# Altium PCB PCB_I.PcbDoc
Units mm, origin at the board's own origin, x right, y up, seen from the top; angles counter-clockwise.
Board outline 60 x 43.75 mm, 2 copper layers (Top Layer, Bottom Layer); 76 components, 81 nets, 394 pads, 51 vias.
Unrouted connection lines stored in the file: 2.
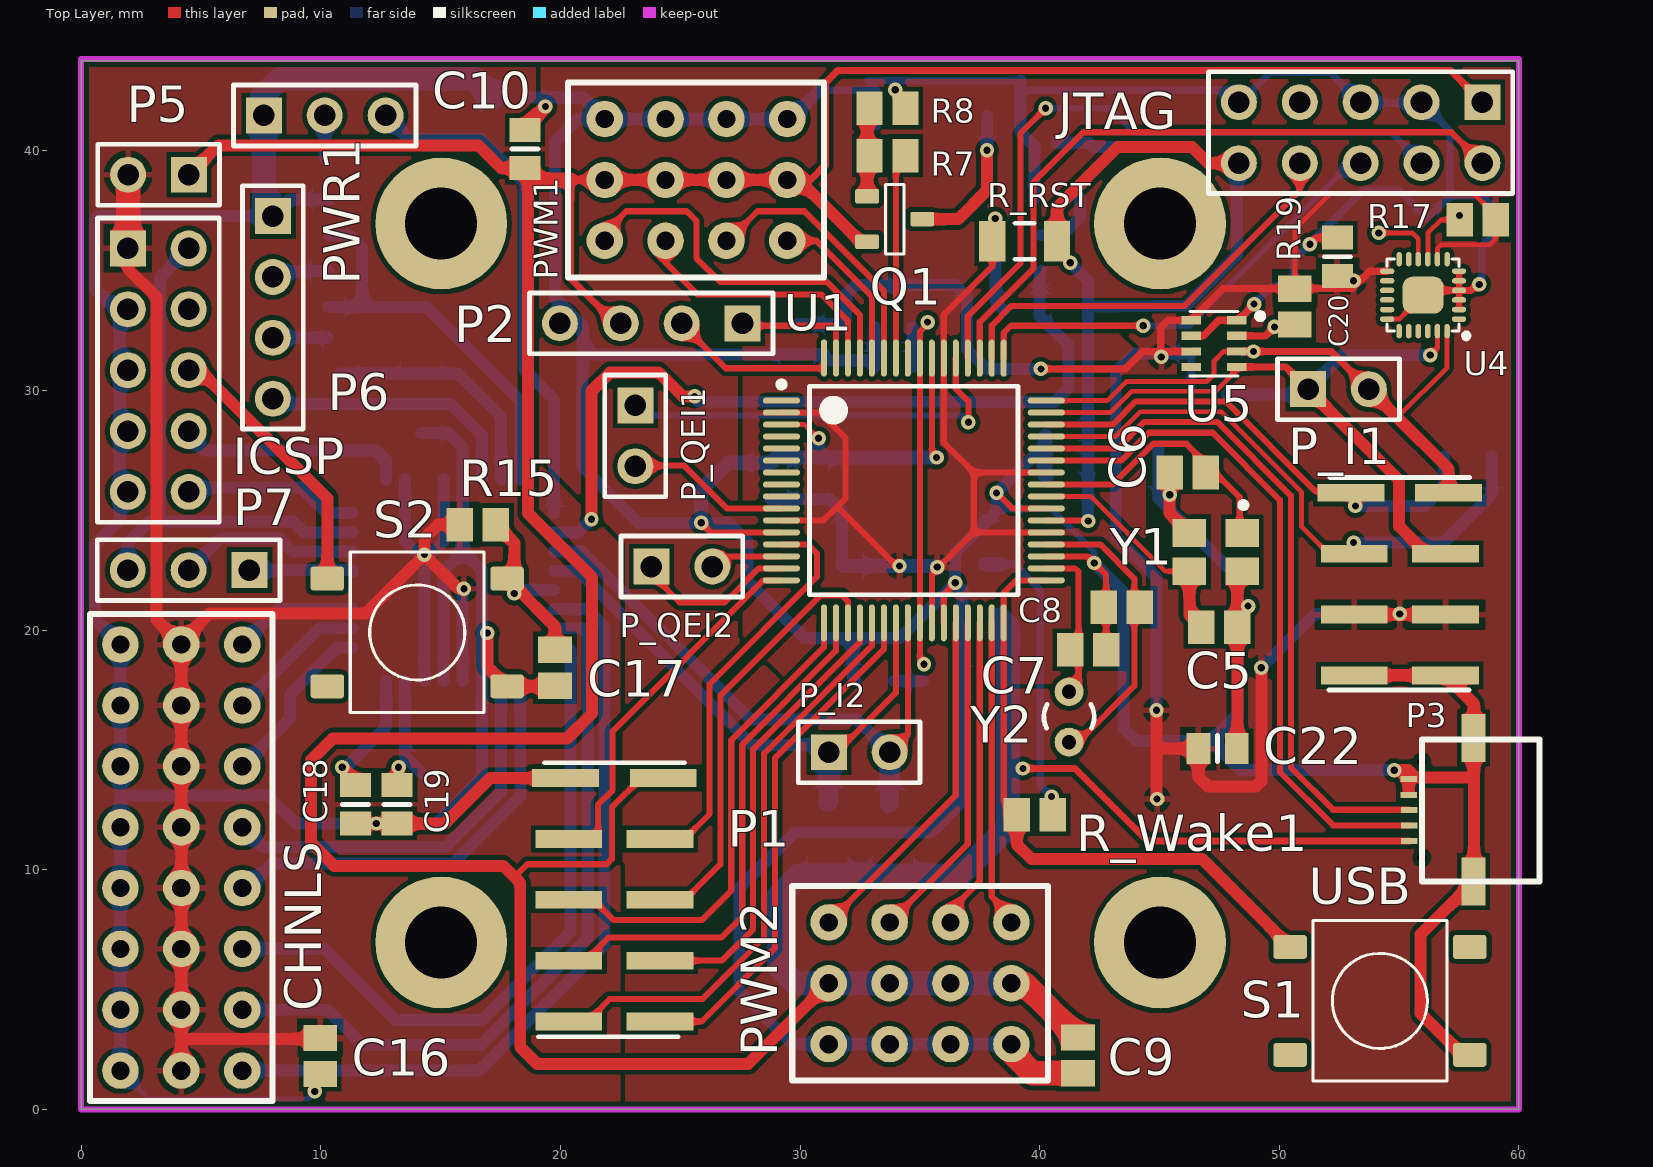
[diagram p0: Top Layer view]
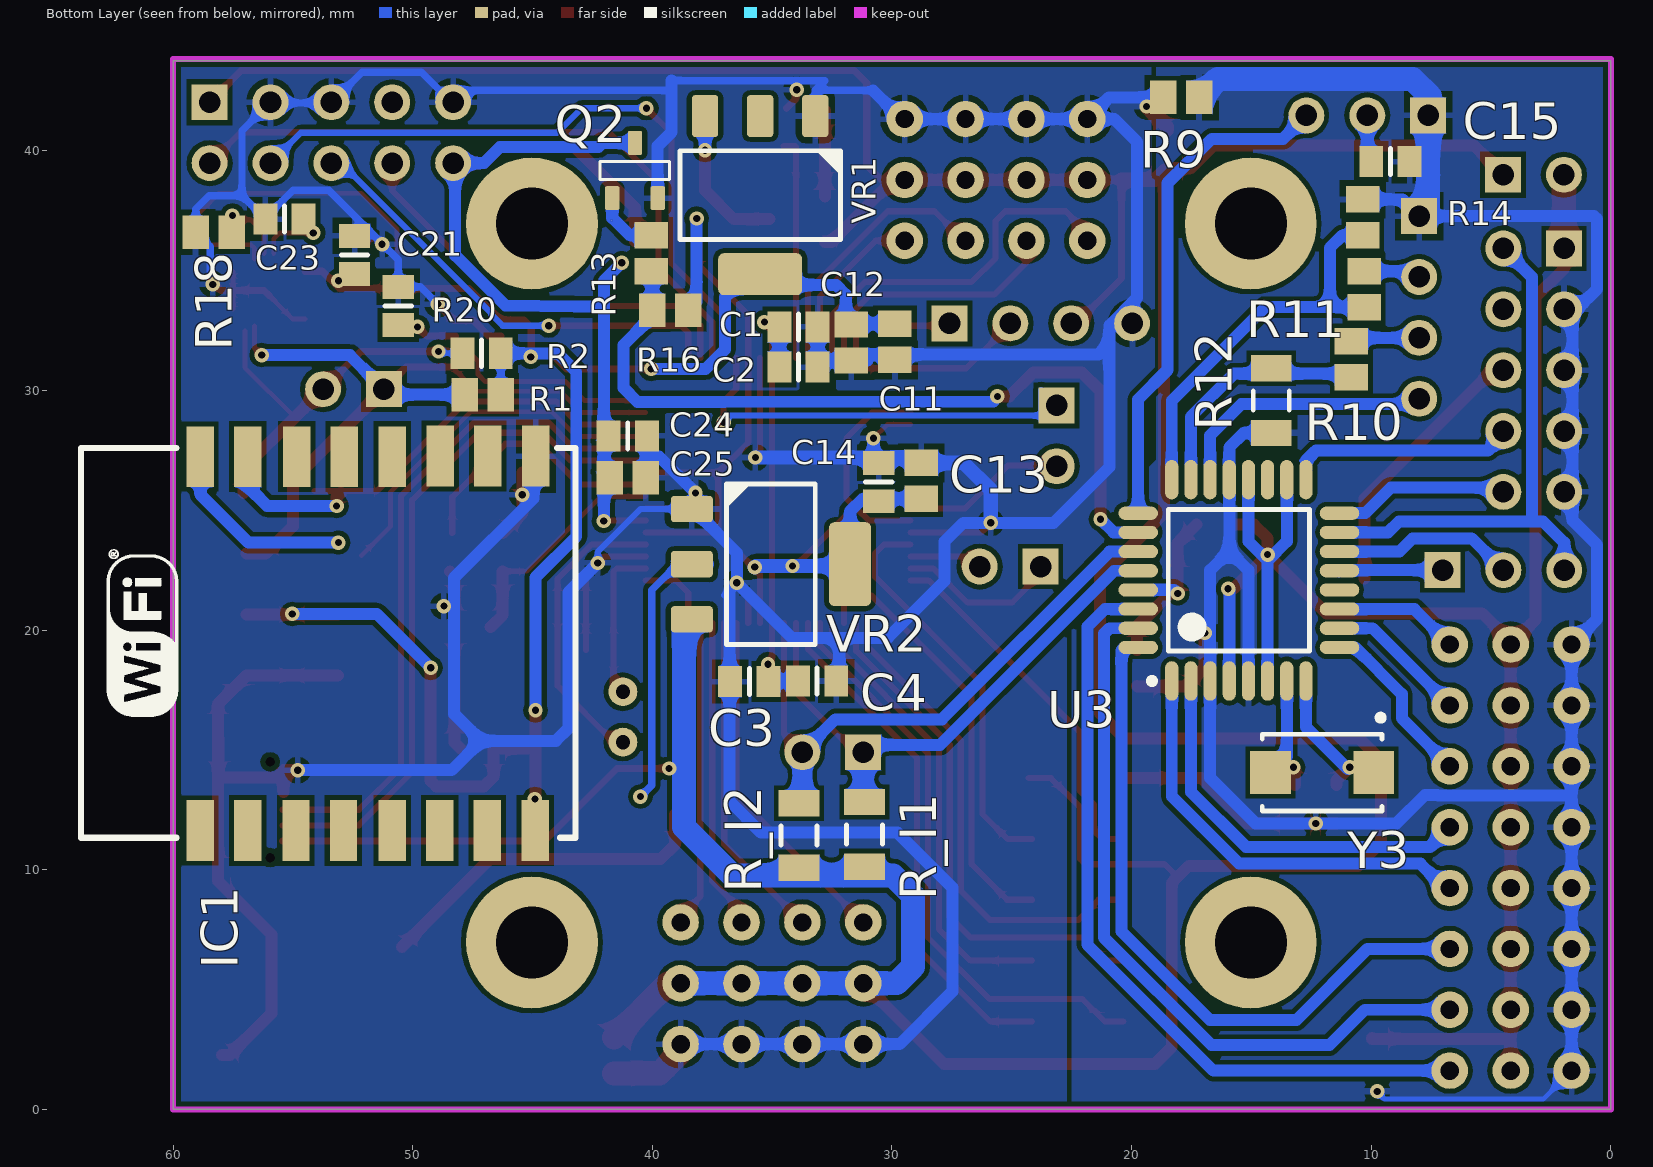
[diagram p1: Bottom Layer view, seen from below]

## Layer stack, top to bottom
Top Solder: solder mask 0.0102, Solder Resist, Dk 3.5
Top Layer: signal copper 0.0356
Dielectric 1: dielectric 0.32, FR-4, Dk 4.8
Bottom Layer: signal copper 0.0356
Bottom Solder: solder mask 0.0102, Solder Resist, Dk 3.5

## Board outline
0,0 60,0 60,43.75 0,43.75

## Design rules (kind name [scope] priority, off if disabled: settings)
Clearance [All] p1: gap=0.2
PolygonConnect [All] p1: connectstyle=Relief reliefconductorwidth=0.254 reliefentries=4 polygonreliefangle="90 Angle" airgapwidth=0.254
RoutingVias [All] p1: holewidth=0.711 width=1.27 viastyle="Through Hole" minholewidth=0.711 minwidth=1.27 maxholewidth=0.711 maxwidth=1.27
SilkToSilkClearance [All] p1: silktosilkclearance=0.1
SilkToSolderMaskClearance [IsPad] p1: minsilkscreentomaskgap=0.1 clearancetoexposedcopper=TRUE
SolderMaskExpansion [All] p1: expansion=0.125 useseparateexpansions=TRUE expansionbottom=0.125
Width [All] p1: maxlimit=1 minlimit=0.2 preferedwidth=0.5
28 further rules are at their usual default settings.

## Classes and differential pairs
component class Sensores: C20 C21 C22 C23 IC1 R17 R18 R19 R20 U4 U5
component class "Procesador Auxiliar": C17 C18 C19 C25 CHNLS ICSP P6 P7 Q2 R10 R11 R12 R13 R14 R15 R16 S2 U3 Y3
component class Alimentacion: C9 C10 C11 C12 C13 C14 C15 C16 P5 PWR1 Q1 R7 R8 R9 VR1 VR2
component class "Procesador Principal": C1 C2 C3 C4 C5 C6 C7 C8 C24 JTAG P1 P2 P3 P_I1 P_I2 P_QEI1 P_QEI2 PWM1 PWM2 R1 R2 R_I1 R_I2 R_RST R_Wake1 S1 U1 USB Y1 Y2

## Components (designator, comment, footprint, x,y, rotation, side; value= is the part's Value field where it differs from the comment)
C1 "Cap" 6-0805_L 33.9,32.65 r0 bottom
C2 "Cap" 6-0805_L 33.9,30.975 r0 bottom
C3 "Cap" 6-0805_L 35.95,17.85 r180 bottom
C4 "Cap" 6-0805_L 33.125,17.875 r0 bottom
C5 "Cap" C0805#1 47.5,20.125 r180 top
C6 "Cap" C0805#1 46.175,26.575 r180 top
C7 "Cap" C0805#1 42.025,19.175 r180 top
C8 "Cap" C0805#1 43.425,20.95 r180 top
C9 "Cap" C0805#1 41.6,2.25 r270 top
C10 "Cap Pol1" 6-0805_L 18.525,40.075 r90 top
C11 "Cap Pol1" C0805#1 29.875,32.025 r270 bottom
C12 "Cap Pol1" C0805#1 31.7,32 r270 bottom
C13 "Cap Pol1" C0805#1 28.775,26.225 r90 bottom
C14 "Cap" 6-0805_L 30.55,26.175 r90 bottom
C15 "Cap" 6-0805_L 9.2,39.55 r0 bottom
C16 "Cap" C0805#1 9.975,2.225 r90 top
C17 "Cap" C0805#1 19.775,18.425 r90 top
C18 "Cap Pol1" 6-0805_L 11.45,12.725 r90 top
C19 "Cap Pol1" 6-0805_L 13.175,12.725 r90 top
C20 "Cap" 6-0805_L 52.425,35.575 r90 top
C21 "Cap" 6-0805_L 52.425,35.65 r270 bottom
C22 "Cap" 6-0805_L 47.425,15.05 r180 top
C23 "Cap" 6-0805_L 55.35,37.15 r180 bottom
C24 "Cap" 6-0805_L 41.029,28.1 r0 bottom
C25 "Cap" C0805#1 41.029,26.36 r0 bottom
CHNLS "Header 8x3" "Header 8x3_mirror" -0.9,-0.925 r0 top
IC1 "ESP8266 ESP-07" "ESP8266 ESP-ANTENNA" 42.45,28.225 r90 bottom
ICSP "Header 5X2H" HDR2X5 1.95,35.925 r270 top
JTAG "Header 5X2" HDR2X5 58.475,42.025 r180 top (schematic designator JTAG1)
P1 "Header 5X2" "SMD_HEADER 5x2" 20.35,13.825 r270 top
P2 "Header 4" HDR1X4 27.6,32.8 r180 top
P3 "Header 4X2" "SMD_HEADER 4x2" 53.125,25.725 r270 top
P5 "Header 2" HDR1X2 4.5,39 r180 top
P6 "Header 4" HDR1X4 8,37.275 r270 top
P7 "Header 3" HDR1X3 7.025,22.5 r180 top
P_I1 "Header 2" HDR1X2 51.2,30.05 r0 top
P_I2 "Header 2" HDR1X2 31.2,14.9 r0 top
P_QEI1 "Header 2" HDR1X2 23.125,29.375 r270 top
P_QEI2 "Header 2" HDR1X2 23.8,22.65 r0 top
PWM1 "Header 4 x 3" Header_4x3_mirror 20.325,42.975 r270 top
PWM2 "Header 4 x 3" Header_4x3 29.675,9.325 r270 top
PWR1 "Header 3" HDR1X3 7.625,41.475 r0 top
Q1 "S8055" SOT23-3 33.95,37.15 r0 top
Q2 "S8050" SOT23-3 40.725,39.175 r90 bottom
R1 "Res1" C0805#1 47.075,29.825 r0 bottom
R2 "Res1" 6-0805_L 47.125,31.55 r180 bottom
R7 "Res1" C0805#1 33.65,39.8 r180 top
R8 "Res1" C0805#1 33.65,41.775 r180 top
R9 "Res1" C0805#1 17.925,42.225 r0 bottom
R10 "Res1" C0805#1 10.825,31.3 r90 bottom
R11 "Res1" C0805#1 10.3,34.225 r90 bottom
R12 "Res1" C1206 14.175,29.575 r90 bottom
R13 "Res1" C0805#1 40.05,35.725 r270 bottom
R14 "Res1" C0805#1 10.35,37.225 r270 bottom
R15 "Res1" C0805#1 16.55,24.4 r0 top
R16 "Res1" C0805#2 39.25,33.35 r180 top
R17 "Res1" C0805#1 58.275,37.125 r0 top
R18 "Res1" C0805#1 58.3,36.6 r0 bottom
R19 "Res1" C0805#1 50.65,33.5 r90 top
R20 "Res1" 6-0805_L 50.6,33.525 r90 bottom
R_I1 "Res1" C1206 31.15,11.475 r270 bottom
R_I2 "Res1" C1206 33.875,11.425 r270 bottom
R_RST "Res1" C1206 39.375,36.225 r0 top (schematic designator R_RST1)
R_Wake1 "Res1" C0805#1 39.8,12.3 r180 top
S1 "TS-1170S-WP" TS-1170S 54.2,4.525 r180 top
S2 "TS-1170S-WP" TS-1170S 14.025,19.9 r0 top
U1 "TM4C123GH6PM" SQFP50P1200X1200-64L 34.75,25.825 r0 top
U3 "ATmega8A-AU" 32A_N 15.525,22.075 r90 bottom
U4 "GYRO/ACCEL/COMPASS/9-AXIS" QFN-24/3MM 56,33.975 r180 top
U5 "BMP280" LGA-8_BMP280(Primary) 47.275,31.95 r0 top
USB "1-353576-1" "Micro USB" 55.95,10.5 r90 top (schematic designator J1)
VR1 "Regulador 3.3V SMD" SOT223 35.5,38.15 r270 bottom
VR2 "Regulador 3.3V SMD" SOT223 35.05,22.75 r180 bottom
Y1 "XTAL" CFPX-5 47.35,23.25 r180 top
Y2 "XTAL" BCY-W2/D2.1 41.225,16.375 r180 top
Y3 "XTAL" 4SMX 12.05,14.05 r0 bottom

## Footprints (in the part's own frame and the unit in brackets; to place one, negate y for a bottom-side part, rotate by r counter-clockwise, add the part's x,y. Pads: shape width x height; smd on the part's side, far side on the other; paste and mask are expansions set on the pad)
4SMX [mm] "Quartz Crystal, SM; Body 5.2 x 3.4 mm (LxW max)"
  rect 1.7x1.8 smd: 1(-2.15,0) 2(2.15,0)
  silkscreen extent -2.57,-2.42 2.5,1.6
6-0805_L [mm] "Chip Resistor, Body 2.0x1.2mm, IPC High Density"
  rect 1x1.3 smd: 1(-0.8,0) 2(0.8,0)
  silkscreen extent 0,-0.55 0,0.55, body extent -1.07,-0.7 1.07,0.7, height 0.7
32A_N [mm] "32-Pin Thin Quad Flat Pack 0.8 mm Pitch, IPC Medium Density"
  oval 1.65x0.55 smd: 1(-4.2,2.8) 2(-4.2,2) 3(-4.2,1.2) 4(-4.2,0.4) 5(-4.2,-0.4) 6(-4.2,-1.2) 7(-4.2,-2) 8(-4.2,-2.8) 17(4.2,-2.8) 18(4.2,-2) 19(4.2,-1.2) 20(4.2,-0.4) 21(4.2,0.4) 22(4.2,1.2) 23(4.2,2) 24(4.2,2.8)
  oval 0.55x1.65 smd: 9(-2.8,-4.2) 10(-2,-4.2) 11(-1.2,-4.2) 12(-0.4,-4.2) 13(0.4,-4.2) 14(1.2,-4.2) 15(2,-4.2) 16(2.8,-4.2) 25(2.8,4.2) 26(2,4.2) 27(1.2,4.2) 28(0.4,4.2) 29(-0.4,4.2) 30(-1.2,4.2) 31(-2,4.2) 32(-2.8,4.2)
  silkscreen extent -4.32,-2.95 2.95,3.75, body extent -3.5,-3.5 3.5,3.5, height 1.2
BCY-W2/D2.1 [mm] "Crystal, Thru-Hole; 2 Leads; Body 2.1 x 6.2 mm (Dia.xH)"
  round 1.2 hole 0.6: 1(0,1.05) 2(0,-1.05)
  silkscreen extent -1.05,-0.53 1.05,0.48
C0805#1 [mm] "Chip Capacitor, Body 2.0x1.3mm, IPC High Density"
  rect 1.1x1.4 smd: 1(-0.75,0) 2(0.75,0)
  body extent -1.1,-0.72 1.1,0.72, height 1.4
C0805#2 [mm] "Chip Capacitor, Body 2.0x1.3mm, IPC High Density"
  rect 1.1x1.4 smd far side: 1(0.75,0) 2(-0.75,0)
  body extent -1.1,-0.72 1.1,0.72, height 1.4
C1206 [mm] "Chip Capacitor, Body 3.2x1.6mm, IPC High Density"
  rect 1.1x1.7 smd: 1(-1.35,0) 2(1.35,0)
  silkscreen extent -0.4,-0.75 0.4,0.75, body extent -1.7,-0.9 1.7,0.9, height 1.3
CFPX-5 [mm] "Quartz Crystal, SM; Body 3.4 x 2.7 mm (LxW max)"
  rect 1.4x1.15 smd: 1(-1.1,-0.8) 2(1.1,-0.8) 3(1.1,0.8) 4(-1.1,0.8)
  silkscreen extent -1.27,-2.09 -1.03,-1.84
"ESP8266 ESP-ANTENNA" [mil] "ESP8266 ESP-ANTENNA"
  rect 100x45 smd: 1(-653,646) 2(-653,568) 3(-653,489) 4(-653,411) 5(-653,331) 6(-653,253) 7(-653,175) 8(-653,96) 9(-38,95) 10(-38,174) 11(-38,252) 12(-39,331) 13(-39,410) 14(-39,488) 15(-39,568) 16(-39,646)
  silkscreen extent -665,30 -25,842
HDR1X2 [mm] "Connector; Header; 2 Position"
  rect 1.5x1.5 hole 0.9: 1(0,0)
  round 1.5 hole 0.9: 2(2.54,0)
  silkscreen extent -1.27,-1.27 3.81,1.27
HDR1X3 [mm] "Connector; Header; 3 Position"
  rect 1.5x1.5 hole 0.9: 1(0,0)
  round 1.5 hole 0.9: 2(2.54,0) 3(5.08,0)
  silkscreen extent -1.27,-1.27 6.35,1.27
HDR1X4 [mm] "Connector; Header; 4 Position"
  rect 1.5x1.5 hole 0.9: 1(0,0)
  round 1.5 hole 0.9: 2(2.54,0) 3(5.08,0) 4(7.62,0)
  silkscreen extent -1.27,-1.27 8.89,1.27
HDR2X5 [mm] "Connector; Header; 5x2 Position"
  rect 1.5x1.5 hole 0.9: 1(0,0)
  round 1.5 hole 0.9: 2(0,2.54) 3(2.54,0) 4(2.54,2.54) 5(5.08,0) 6(5.08,2.54) 7(7.62,0) 8(7.62,2.54) 9(10.16,0) 10(10.16,2.54)
  silkscreen extent -1.27,-1.27 11.43,3.81
"Header 8x3_mirror" [mil]
  round 60 hole 30: 1(300,100) 2(300,200) 3(300,300) 4(300,400) 5(300,500) 6(300,600) 7(300,700) 8(300,800) GND(100,100) GND(100,200) GND(100,300) GND(100,400) GND(100,500) GND(100,600) GND(100,700) GND(100,800) VCC(200,100) VCC(200,200) VCC(200,300) VCC(200,400) VCC(200,500) VCC(200,600) VCC(200,700) VCC(200,800)
  silkscreen extent 50,50 350,850
Header_4x3 [mil]
  round 60 hole 30: 1(60,60) 2(60,160) 3(60,260) 4(60,360) 5(160,260) 5(160,360) 5(160,160) 5(160,60) 6(260,160) 6(260,260) 6(260,360) 6(260,60)
  silkscreen extent 0,0 320,420
Header_4x3_mirror [mil]
  round 60 hole 30: 1(265,60) 2(265,160) 3(265,260) 4(265,360) 5(165,260) 5(165,360) 5(165,160) 5(165,60) 6(65,360) 6(65,260) 6(65,160) 6(65,60)
  silkscreen extent 5,0 325,420
LGA-8_BMP280(Primary) [mm]
  rect 0.8x0.35 smd paste-25.4 mask-25.4: 1(0.95,0.975) 2(0.95,0.325) 3(0.95,-0.325) 4(0.95,-0.975) 5(-0.95,-0.975) 6(-0.95,-0.325) 7(-0.95,0.325) 8(-0.95,0.975)
  silkscreen extent -1,-1.35 2.02,1.35
"Micro USB" [mm]
  round 0 hole 0.4: 0(0,0) 0(4,0)
  rect 0.25x0.7 smd: 1(0.7,0.525) 2(1.35,0.525) 3(2,0.525) 4(2.625,0.55) 5(3.275,0.55)
  rect 2x1 smd: 6(-1,-2.15) 6(5,-2.15)
  silkscreen extent -1,-4.9 4.92,0
QFN-24/3MM [mm]
  rrect50% 1.7x1.54 smd: 0(0,0)
  rrect100% 0.6x0.23 smd: 1(-1.5,1) 2(-1.5,0.6) 3(-1.5,0.2) 4(-1.5,-0.2) 5(-1.5,-0.6) 6(-1.5,-1) 13(1.5,-1) 14(1.5,-0.6) 15(1.5,-0.2) 16(1.5,0.2) 17(1.5,0.6) 18(1.5,1)
  rrect100% 0.23x0.6 smd: 7(-1,-1.5) 8(-0.6,-1.5) 9(-0.2,-1.5) 10(0.2,-1.5) 11(0.6,-1.5) 12(1,-1.5) 19(1,1.5) 20(0.6,1.5) 21(0.2,1.5) 22(-0.2,1.5) 23(-0.6,1.5) 24(-1,1.5)
  silkscreen extent -2,-1.5 1.5,1.9
"SMD_HEADER 4x2" [mm]
  rect 0.74x2.79 smd: 1(0,-0.13) 2(0,3.94) 3(2.54,3.81) 4(2.54,0) 5(5.08,0) 6(5.08,3.81) 7(7.62,0) 8(7.62,3.81)
  silkscreen extent -0.64,-1.05 8.23,4.83
"SMD_HEADER 5x2" [mm]
  rect 0.74x2.79 smd: 1(0,-0.13) 2(0,3.94) 3(2.54,3.81) 4(2.54,0) 5(5.08,0) 6(5.08,3.81) 7(7.62,0) 8(7.62,3.81) 9(10.16,0) 10(10.16,3.81)
  silkscreen extent -0.64,-1.27 10.79,4.83
SOT23-3 [mm] "SOT23, 3 pin"
  round 0.5 on Mech15: 0(0,0)
  rrect25% 1x0.6 smd: 1(-1.15,0.95) 2(-1.15,-0.95) 3(1.15,0)
  silkscreen extent -0.38,-1.45 0.38,1.45, body extent -1.4,-1.45 1.4,1.45, height 1.29
SOT223 [mm] "SOT223 /SC-73"
  round 1 on Mech15: 0(0,0)
  rrect25% 1.75x1.1 smd: 1(-3.3,2.3) 2(-3.3,0) 3(-3.3,-2.3)
  rrect25% 1.75x3.5 smd: 2(3.3,0)
  silkscreen extent -1.85,-3.35 1.85,3.35, body extent -3.65,-3.35 3.65,3.35, height 1.8
SQFP50P1200X1200-64L [mm] "Shrink QFP, 64-Leads, Body 10x10mm, Pitch 0.5mm, IPC High Density"
  oval 1.55x0.25 smd: 1(-5.525,3.75) 2(-5.525,3.25) 3(-5.525,2.75) 4(-5.525,2.25) 5(-5.525,1.75) 6(-5.525,1.25) 7(-5.525,0.75) 8(-5.525,0.25) 9(-5.525,-0.25) 10(-5.525,-0.75) 11(-5.525,-1.25) 12(-5.525,-1.75) 13(-5.525,-2.25) 14(-5.525,-2.75) 15(-5.525,-3.25) 16(-5.525,-3.75) 33(5.525,-3.75) 34(5.525,-3.25) 35(5.525,-2.75) 36(5.525,-2.25) 37(5.525,-1.75) 38(5.525,-1.25) 39(5.525,-0.75) 40(5.525,-0.25) 41(5.525,0.25) 42(5.525,0.75) 43(5.525,1.25) 44(5.525,1.75) 45(5.525,2.25) 46(5.525,2.75) 47(5.525,3.25) 48(5.525,3.75)
  oval 0.25x1.55 smd: 17(-3.75,-5.525) 18(-3.25,-5.525) 19(-2.75,-5.525) 20(-2.25,-5.525) 21(-1.75,-5.525) 22(-1.25,-5.525) 23(-0.75,-5.525) 24(-0.25,-5.525) 25(0.25,-5.525) 26(0.75,-5.525) 27(1.25,-5.525) 28(1.75,-5.525) 29(2.25,-5.525) 30(2.75,-5.525) 31(3.25,-5.525) 32(3.75,-5.525) 49(3.75,5.525) 50(3.25,5.525) 51(2.75,5.525) 52(2.25,5.525) 53(1.75,5.525) 54(1.25,5.525) 55(0.75,5.525) 56(0.25,5.525) 57(-0.25,5.525) 58(-0.75,5.525) 59(-1.25,5.525) 60(-1.75,5.525) 61(-2.25,5.525) 62(-2.75,5.525) 63(-3.25,5.525) 64(-3.75,5.525)
  silkscreen extent -5.65,-4.35 4.35,4.55, body extent -5,-5 5,5, height 2.2
TS-1170S [mm] "6.5x6.5mm SMD tact switch 7.0mm stem"
  round 0.508 on Mech15: 0(0,0)
  rrect25% 1.4x1 smd: 1(-3.75,2.25) 1(3.75,2.25) 2(-3.75,-2.25) 2(3.75,-2.25)
  silkscreen extent -2.79,-3.35 2.79,3.35, body extent -4,-3.25 4,3.25, height 7

## Part data
C1 C2 C3 C4 C5 C6 C7 C8 C15 C16 C17 C20 C21 C22 C23 C24 C25: "Capacitor"
C9 C14: library part "Cap Pol1", "Polarized Capacitor (Radial)"
C10 C11 C12 C13: "Polarized Capacitor (Radial)"
C18 C19: library part Cap, "Capacitor"
ICSP: "Header, 5-Pin, Dual row, Right Angle"
JTAG P1: "Header, 5-Pin, Dual row"
P2 P6: "Header, 4-Pin"
P3: "Header, 4-Pin, Dual row"
P5 P_I1 P_I2 P_QEI1 P_QEI2: "Header, 2-Pin"
P7 PWR1: "Header, 3-Pin"
Q1: "PNP SMD General Purpose Amplifier"
Q2: "NPN SMD General Purpose Amplifier"
R1 R2 R7 R8 R9 R10 R11 R12 R13 R14 R15 R16 R17 R18 R19 R20 R_I1 R_I2 R_RST R_Wake1: "Resistor"
S1 S2: library part SW_SMD_PB_7.0mm, "Switch SMD Tact 7.0mm Stem"
U3: "8-bit AVR Microcontroller, 8KB Flash, 512 Bytes EEPROM, 1KB SRAM, 32-pin TQFP, Industrial Grade (-40°C to 85°C)"
U4: library part MPU-9250
U5: "Barometro"
USB: "USB 1.1, Right Angle, SMT, A Type, Receptacle, 4 Position, White"
VR1 VR2: "AMS1117"
Y1 Y2 Y3: "Crystal Oscillator"

## Free pads (board coordinates)
  round 5.5 hole 3: 0(45.025,6.963) 1(15.025,6.963) 2(15.025,36.963) 3(45.025,36.963)

## Via types
v1: diameter 0.6, hole 0.3, Top Layer to Bottom Layer, 51 vias

## Nets (pads, with @x,y where several pads share a name; then routed paths per layer and width w, separated by ;. In a path a pad name is that pad's centre, name@x,y a point inside that pad or via, vN(x,y) a via of type N, cw(c..) or ccw(c..) an arc to the next point about the centre after c; other vN are vias at no path point)
3.3_VCC: C11.1 C12.1 C20.1 C21.2 C22.2 IC1.8 P3.5 P3.6 R1.1 R2.2 R17.2 R19.2 U4.8 U4.13 U5.6 U5.8 VR1.2 | length 92.5
  Top Layer w0.2: R19.2 50.65,36.725 52.15,38.225 58.1,38.225 59.025,37.3 R17.2 59.025,36.325 58.775,36.075 57.172,36.075 56.75,36.075 56.6,35.925 U4.8
  Top Layer w0.3: v1(40.05,30.9) 43.575,30.9 44.3,31.625 45.05,31.625 45.05,32.625 45.35,32.925 U5.8 47.65,34.25 R19.2 53.05,34.25 53.775,34.975 U4.13 ; v1@45.075,31.625 U5.6
  Top Layer w0.5: v1(44.875,16.65) 44.875,14.95 ; v1(44.9,12.95) 44.875,12.975 44.875,14.95 ; C22.2@46.4,15.05 44.975,15.05 44.875,14.95 ; C22.2 46.625,13.875 47.025,13.475 49.025,13.475 49.25,13.7 v1(49.25,18.425) ; P3.5 P3.6
  Bottom Layer w0.3: R2.2@46.25,31.4 46.325,31.325 R1.1
  Bottom Layer w0.5: C11.1 31.675,32.775 C12.1 31.925,32.975 31.925,34 32.325,34.4 36.475,34.4 36.975,33.9 36.975,31.7 37.775,30.9 v1(40.05,30.9) ; v1(44.875,16.65) 44.875,22.2 43.175,23.9 43.175,30.775 43.95,31.55 R2.2 ; v1(49.25,18.425) 51.5,20.675 v1(55.025,20.675)
  other v1: 45.075,31.4 53.1,34.575
3.3_VCC_MICRO: C13.1 C14.1 R16.1 R_RST.1 R_Wake1.1 U1.2 U1.11 U1.26 U1.37 U1.42 U1.54 VR2.2 | length 61.4
  Top Layer w0.256: U1.11 30.975,24.575 31.45,25.05 ; U1.2 30.825,29.075 31.9,28 31.9,25.5 31.45,25.05 ; v1(34.15,22.675) 34.05,22.775 33.925,22.775 31.65,25.05 31.45,25.05 ; U1.26 35.5,22.325 37.25,24.075 ; R_RST.1 38.025,35.175 36,33.15 U1.54 36,27.825 37.25,26.575 ; U1.37 37.25,24.075 ; U1.42 37.25,26.575 ; 37.25,24.075 37.25,26.575
  Bottom Layer w0.3: VR2.2@38.35,22.75 38.95,22.75 40.025,21.675 40.025,13.525 v1(40.5,13.05)
  Bottom Layer w0.5: C13.1 31.225,25.475 31.75,24.95 VR2.2@31.75,22.75 ; v1(38.15,37.175) 38.15,33.7 R16.1
  Bottom Layer w0.6: VR2.2@31.75,22.75 31.825,22.675 v1(34.15,22.675) 35.675,22.675 v1(35.725,22.625) ; VR2.2@37.725,22.75 VR2.2@38.35,22.75
5_VCC_BAT: C16.2 CHNLS.VCC ICSP.1 P5.2 R15.1 U3.4 U3.6 U3.18 U3.20 | length 77.3
  Top Layer w0.5: ICSP.1@1.6,36.1 ICSP.1@1.95,35.75 ; ICSP.1 ICSP.1@1.95,35.75 ; CHNLS.VCC@4.18,1.615 4.18,2.943 9.975,2.943 C16.2 ; 4.18,2.95 4.18,4.155 4.18,6.695 4.18,9.235 4.18,11.775 4.18,14.315 4.18,16.855 CHNLS.VCC@4.18,19.395 ; R15.1 14.9,24.4 14.325,23.825 v1(14.325,23.15) ; v1(15.975,21.725) 15.75,21.725 v1(14.325,23.15) ; ICSP.1@1.95,35.75 1.95,35.082 3.15,33.882 3.15,25.263 3.145,25.258 3.145,20.43 CHNLS.VCC@4.18,19.395 ; CHNLS.VCC@4.18,19.395 4.18,19.505 5.375,20.7 11.875,20.7 v1(14.325,23.15)
  Top Layer w1: ICSP.1 1.96,35.935 P5.2
  Bottom Layer w0.5: U3.18 13.525,23.7 v1@14.325,22.9 ; U3.6 v1@14.325,22.9 ; U3.20 15.125,23.7 v1@14.325,22.9 ; U3.4 15.925,21.675 v1(15.975,21.725)
5V_VCC: C9.1 C10.1 JTAG.1 P1.2 P2.3 P5.1 PWM1.5 PWM2.5 Q1.2 R_I1.2 R_I2.2 USB.1 VR2.3 | length 210.7
  Top Layer w0.256: 18.325,2.6 18.225,2.7 18.225,9.823 18.627,10.225 21.925,10.225 22.15,10.45 22.15,12.6 23.375,13.825 P1.2
  Top Layer w0.3: PWM1.5@21.849,38.784 20.425,38.784 20.425,34.675 P2.3@22.4,32.7 ; PWM1.5@29.683,38.784 29.941,38.784 30.434,38.784 31.05,39.4 31.05,42.825 31.572,43.347 57.153,43.347 JTAG.1 ; v1(39.3,14.225) 41.475,14.225 44.5,11.2 USB.1
  Top Layer w0.5: P5.1 5.725,40.225 16.575,40.225 17.525,39.275 C10.1 18.65,39.15 18.65,24.875 21.325,22.2 21.325,16.525 20.275,15.475 10.5,15.475 9.6,14.575 9.6,11.125 10.562,10.163 17.612,10.163 18.325,9.45 18.325,2.6 19.025,1.9 27.838,1.9 PWM2.5@31.199,5.261 ; PWM1.5@21.849,38.784 24.389,38.784 26.929,38.784 29.469,38.784 PWM1.5@29.683,38.784 ; PWM1.5@29.941,38.784 32.525,36.2 Q1.2
  Top Layer w0.6: C10.1@18.65,39.15 19.016,38.784 20.425,38.784
  Top Layer w1: PWM2.5@38.819,5.261 39.339,5.261 C9.1
  Bottom Layer w1: VR2.3 38.675,20.125 38.675,11.775 36.65,9.75 29.95,9.75 29.125,8.925 29.125,5.95 29.814,5.261 31.199,5.261 33.739,5.261 36.279,5.261 PWM2.5@38.819,5.261
12_VCC: C15.2 PWR1.2 | length 1.8
  Bottom Layer w0.5: C15.2@10.165,39.715 PWR1.2
CE_SPI_0: P1.3 U1.13 | length 16.9
  Top Layer w0.254: P1.3 25.185,11.285 26.222,12.322 26.222,17.747 30.7,22.225 30.7,23.2 30.325,23.575 U1.13
CLK_SPI_0: P1.6 U1.19 | length 18.2
  Top Layer w0.254: P1.6 25.195,8.745 26.676,10.226 26.676,17.265 30.861,21.45 31.75,21.45 32,21.2 U1.19
ECHO: P2.1 U1.63 | length 5.2
  Top Layer w0.256: P2.1@27.6,32.7 31.4,32.7 31.5,32.6 U1.63
FSS_SPI_0: P1.8 U1.20 | length 19.1
  Top Layer w0.254: P1.8 26.73,6.205 28.042,7.517 28.042,15.026 32.5,19.484 U1.20
GND: C1.1 C2.1 C3.1 C4.1 C5.1 C6.2 C7.1 C8.2 C9.2 C10.2 C11.2 C12.2 C13.2 C14.2 C20.2 C21.1 C22.1 C23.1 C24.1 C25.1 IC1.9 JTAG.3 JTAG.5 JTAG.9 P2.4 P3.7 P3.8 PWM1.6 PWM2.6 Q2.2 R8.1 R9.2 R18.2 R20.2 S1.1 U1.3 U1.12 U1.27 U1.35 U1.39 U1.55 U4.0 U4.2 U4.3 U4.4 U4.5 U4.6 U4.18 U5.1 U5.7 USB.4 USB.5 USB.6 VR1.1 VR2.1 Y1.2 Y1.4 | length 293.9
  Top Layer w0.2: U1.3 30.2,28.575 v1(30.775,28) ; U4.18 55,32.975 U4.0 ; U4.2@57.5,33.39 U4.3 U4.4 U4.5 U4.6
  Top Layer w0.256: v1(25.875,24.475) 26.275,24.075 U1.12 ; v1@35.5,27.25 U1.55 ; U1.27 36,21.5 v1(36.475,21.975) ; v1(38.2,25.725) 38.85,25.075 U1.39 ; U1.35 42,23.075 v1(42.275,22.8) 42.775,22.3 C7.1
  Top Layer w0.3: v1(33.975,42.55) 34.025,42.5 34.025,42.15 R8.1 ; U5.7 46.825,32.275 47.475,32.925 U5.1 48.275,32.925 v1(48.95,33.6) ; v1(51.275,36.1) 51.55,36.375 C20.2 ; U4.0 56.2,34.175 U4.4 58,34.175 58.25,34.425 v1(58.344,34.425)
  Top Layer w0.5: C6.2 45.425,24.875 Y1.2 ; C22.1@48,15.05 48.25,15.3 C5.1 48.25,22.25 Y1.4 ; P3.7 P3.8 58.125,16.915 58.125,9.525 58.1,9.5 55.9,7.3 55.9,4 57.625,2.275 S1.1@57.95,2.275 ; v1(54.8,14.15) v1@55.025,14.15 ; USB.4@55.4,13.25 USB.5 v1@55.025,14.15 ; USB.6@58.1,15.5 58.1,13.85 55.681,13.85 55.381,14.15 v1@55.025,14.15
  Top Layer w0.6: C10.2 18.525,41 v1(19.375,41.85)
  Top Layer w1: PWM2.6@38.819,2.721 38.819,2.381 39.7,1.5 C9.2
  Bottom Layer w0.256: 36.775,21.675 37,21.45 ; VR2.1 40.5,25.05 42.275,23.275 v1(42.275,22.8)
  Bottom Layer w0.3: 30.8,42.525 33.2,42.525 ; VR1.1@33.2,41 33.2,42.525 ; 39.2,42.525 48.878,42.525 49.628,43.275 52.12,43.275 53.395,42 JTAG.3@55.935,42 ; 39.2,42.925 32.8,42.925 33.2,42.525 ; v1(48.95,33.6) 49.675,34.325 R20.2 50.6,35.45 53.5,38.35 54.995,38.35 56.15,37.195 C23.1 57.125,38.125 ; JTAG.3 57.125,40.835 57.125,38.125 ; v1(58.344,34.425) 58.45,34.531 58.45,36 R18.2 59.05,37.575 58.5,38.125 57.125,38.125
  Bottom Layer w0.5: R9.2 20.948,42.225 PWM1.6@21.849,41.324 ; C14.2@30.775,27.2 v1(30.775,28) ; 30.8,42.525 29.599,41.324 29.469,41.324 26.929,41.324 24.389,41.324 PWM1.6@21.849,41.324 ; C4.1 32.2,18 32.2,19.675 ; C1.1 C2.1 32.825,31.25 31.025,31.25 31.025,31.5 21.375,31.5 20.93,31.945 20.93,32.7 ; PWM2.6@38.819,2.721 36.279,2.721 33.739,2.721 31.199,2.721 29.679,2.721 27.475,4.925 27.475,9.25 29.775,11.55 35.475,11.55 36.775,12.85 36.775,21.675 v1(36.475,21.975) ; 39.2,42.925 39.2,40.775 39.775,40.2 Q2.2 ; 40.229,27.25 39.725,27.25 v1(38.2,25.725) 38.2,25.2 VR2.1 38.3,25.05 36.475,23.225 v1(36.475,21.975) ; v1(42.275,22.8) 43.5,21.575 43.5,15.9 44.025,15.375 47.15,15.375 ; IC1.9@44.963,27.585 44.963,25.487 48.275,22.175 48.275,16.5 47.15,15.375 ; v1(54.8,14.15) 48.375,14.15 47.15,15.375 ; 20.93,32.7 20.93,26.795 23.25,24.475 v1(25.875,24.475) 27.025,24.475 27.8,23.7 27.8,22.05 30.175,19.675 32.2,19.675 ; 20.93,32.7 19.775,33.855 19.775,40.375 20.724,41.324 PWM1.6@21.849,41.324 ; 32.2,19.675 34.175,19.675 v1(36.475,21.975)
  Bottom Layer w0.6: v1(25.875,24.475) 25.875,25.85 27,26.975 C13.2 29,27.2 30.775,27.2 v1(35.7,27.2) ; C24.1 40.229,27.25 40.229,26.41 C25.1
  other v1: 48.7,21 45.425,25.65
GND_BAT: C15.1 C16.1 C17.1 C18.1 C19.1 CHNLS.GND ICSP.3 ICSP.5 ICSP.7 ICSP.9 P1.1 P6.1 PWR1.1 R9.1 R12.1 R14.1 S2.2 U3.3 U3.5 U3.21 | length 124
  Top Layer w0.5: C18.1 v1(12.313,11.925) C19.1 15.175,11.925 17.075,13.825 P1.1 ; v1(16.95,19.875) 16.95,18.475 17.775,17.65 19.75,17.65 C17.1
  Bottom Layer w0.2: CHNLS.GND@1.64,1.615 2.827,0.428 9.453,0.428 v1@9.6,0.575
  Bottom Layer w0.5: CHNLS.GND@1.64,1.615 1.64,4.155 1.64,6.695 1.64,9.235 1.64,11.775 1.64,13.025 ; ICSP.3 ICSP.3@1.6,33.385 ; R14.1 8.7,37.975 P6.1 0.7,37.275 0.578,37.153 0.578,34.225 1.418,33.385 ICSP.3@1.6,33.385 ; R12.1 15.325,28.225 15.925,27.625 U3.21 15.925,23.3 ; U3.5 15.125,22.5 15.925,23.3 ; ICSP.3@1.6,33.385 1.6,24.575 0.578,23.553 0.578,20.457 1.64,19.395 1.64,16.855 1.64,14.315 1.64,13.025 ; 1.64,13.025 1.718,13.103 7.222,13.103 7.244,13.125 7.75,13.125 8.95,11.925 v1(12.313,11.925) 14.825,11.925 16.725,13.825 U3.3 16.725,22.5 15.925,23.3
  Bottom Layer w1: PWR1.1@7.55,41.225 7.55,42.275 8.272,42.997 16.403,42.997 R9.1 ; PWR1.1 7.625,37.65 P6.1
  other v1: 9.75,0.75
I2C0_SCL: P3.3 P_I1.1 R1.2 U1.47 U4.23 U5.4 | length 32.4
  Top Layer w0.2: U1.47 42.95,29.075 43.842,29.967 47.342,29.967 48.225,30.85 U5.4 ; v1(56.3,31.475) 56.6,31.775 U4.23@56.6,32.7
  Top Layer w0.3: U5.4 50.275,30.975 P_I1.1
  Top Layer w0.5: P_I1.1 55,26.25 55,24.325 56.14,23.185 P3.3
  Bottom Layer w0.5: R1.2 50.975,29.825 P_I1.1 52.625,31.475 v1(56.3,31.475)
I2C0_SDA: P3.2 P_I1.2 R2.1 U1.48 U4.24 U5.3 | length 26.5
  Top Layer w0.2: U1.48 42.825,29.575 43.617,30.367 46.975,30.367 47.275,30.667 47.275,31.225 47.675,31.625 U5.3 ; 54.87,28.92 54.97,28.92 57,30.95 U4.24
  Top Layer w0.3: U5.3 v1(48.925,31.625) 52.165,31.625 P_I1.2
  Top Layer w0.5: P_I1.2 54.87,28.92 57.065,26.725 P3.2
  Bottom Layer w0.2: R2.1 48.85,31.55 v1(48.925,31.625)
I2C1_SCL: P_I2.1 R_I1.1 U1.23 U3.28 | length 23.5
  Top Layer w0.256: P_I2.1@31.025,14.4 34,17.375 U1.23
  Bottom Layer w0.5: U3.28 20.725,22.475 27.99,15.21 P_I2.1@31.025,15.21
  Bottom Layer w0.8: R_I1.1 31.2,12.875 P_I2.1
I2C1_SDA: P_I2.2 R_I2.1 U1.24 U3.27 | length 25.3
  Top Layer w0.256: P_I2.2 34.5,15.66 U1.24
  Bottom Layer w0.5: U3.27 20.915,23.275 27.915,16.275 32.365,16.275 P_I2.2
  Bottom Layer w0.8: R_I2.1@33.74,12.775 P_I2.2
IRQ_SPI_0: P1.4 U1.16 | length 15.4
  Top Layer w0.256: P1.4 21.235,11.285 21.575,11.625 21.575,12.725 22.175,13.325 22.175,15.775 28.475,22.075 U1.16
LED_0: U1.7
LED_1: U1.8
LED_2: U1.9
MISO: ICSP.10 U3.16 | length 7.6
  Bottom Layer w0.5: ICSP.10@4.14,25.94 9.185,25.94 10.25,24.875 U3.16
MOSI: ICSP.2 P7.3 U3.15 | length 23.1
  Bottom Layer w0.5: P7.3 1.945,23.645 2.825,24.525 3.275,24.525 ; ICSP.2@4.14,36.015 ICSP.2@4.14,36.1 ; ICSP.2 3.29,34.725 3.29,24.54 3.275,24.525 ; U3.15 9.3,24.075 8.85,24.525 3.275,24.525
NetC1_2: C1.2 C2.2 C3.2 C4.2 U1.25 U1.56 | length 17.4
  Top Layer w0.254: v1(35.175,18.575) 35,18.75 U1.25 U1.56 35,32.45 35.325,32.775 v1(35.325,32.85)
  Bottom Layer w0.254: C3.2@35.125,17.875 C3.2
  Bottom Layer w0.5: C4.2 C3.2@35.125,17.875 ; C2.2 C1.2
NetC18_2: C18.2 U3.8 Y3.1 | length 5.4
  Top Layer w0.5: v1(10.9,14.275) 11.45,13.725 C18.2
  Bottom Layer w0.5: v1@10.975,14.2 12.725,15.95 U3.8
NetC19_2: C19.2 U3.7 Y3.2 | length 4.9
  Top Layer w0.5: C19.2 13.175,14.2 v1(13.25,14.275)
  Bottom Layer w0.5: U3.7 13.525,14.725 Y3.2
NetC23_2: C23.2 U4.10 | length 2.4
  Top Layer w0.2: v1(54.15,36.575) 55.55,36.575 55.8,36.325 U4.10@55.8,35.7
NetCHNLS_1: CHNLS.1 U3.30 | length 33
  Bottom Layer w0.5: CHNLS.1 16.59,1.615 21.85,6.875 21.85,20.14 21.115,20.875 U3.30
NetCHNLS_2: CHNLS.2 U3.31 | length 31.1
  Bottom Layer w0.5: CHNLS.2 10.27,4.155 11.75,2.675 16.66,2.675 21.15,7.165 21.15,19.85 20.925,20.075 U3.31
NetCHNLS_3: CHNLS.3 U3.32 | length 28.9
  Bottom Layer w0.5: CHNLS.3 10.155,6.695 13.125,3.725 16.72,3.725 20.425,7.43 20.425,19.15 20.3,19.275 U3.32
NetCHNLS_4: CHNLS.4 U3.1 | length 18
  Bottom Layer w0.5: CHNLS.4 6.935,9.235 7.95,10.25 15.515,10.25 18.325,13.06 U3.1
NetCHNLS_5: CHNLS.5 U3.2 | length 16.7
  Bottom Layer w0.5: CHNLS.5 7.545,10.95 15.225,10.95 17.525,13.25 U3.2
NetCHNLS_6: CHNLS.6 U3.9 | length 7.2
  Bottom Layer w0.5: CHNLS.6 8.725,16.32 8.725,17.325 10.675,19.275 U3.9
NetCHNLS_7: CHNLS.7 U3.10 | length 5.9
  Bottom Layer w0.5: CHNLS.7 9.94,20.075 U3.10
NetCHNLS_8: CHNLS.8 U3.11 | length 5.2
  Bottom Layer w0.5: CHNLS.8 8.2,20.875 U3.11
NetP6_2: P6.2 R11.2 | length 2.4
  Bottom Layer w0.5: P6.2 8.24,34.975 R11.2
NetP6_3: P6.3 R10.2 | length 2.3
  Bottom Layer w0.5: P6.3 10.27,32.195 R10.2@10.275,32.2
NetP6_4: P6.4 U3.22 | length 11.2
  Bottom Layer w0.5: P6.4 8.23,29.425 15.425,29.425 16.725,28.125 U3.22
NetP7_1: P7.1 U3.13 | length 8.7
  Bottom Layer w0.256: P7.1 7.05,22.475 U3.13
  Bottom Layer w0.5: P7.1 11.3,22.5 U3.13 U3.13@11.35,22.45
NetP7_2: P7.2 U3.14 | length 7.6
  Bottom Layer w0.5: P7.2 5.81,23.825 8.275,23.825 8.825,23.275 U3.14
NetQ1_1: Q1.1 R7.2 R8.2 | length 3.7
  Top Layer w0.5: Q1.1 32.8,41.675 R8.2
NetQ1_3: Q1.3 VR1.3 | length 6.3
  Top Layer w0.5: Q1.3 36.6,37.15 37.8,38.35 v1(37.8,40.025)
  Bottom Layer w0.5: v1(37.8,40.025) VR1.3
NetQ2_1: Q2.1 R13.1 | length 2.8
  Bottom Layer w0.5: R13.1 40.95,36.475 41.675,37.2 Q2.1
NetR10_1: R10.1 R12.2 U3.23 | length 10.1
  Bottom Layer w0.5: R10.1@10.775,30.7 15.725,30.7 17.525,28.9 U3.23
NetR11_1: R11.1 R14.2 U3.24 | length 17
  Bottom Layer w0.5: R11.1 11.725,33.475 ; R14.2 11.2,36.475 11.725,35.95 11.725,33.475 ; U3.24 18.325,29.575 14.425,33.475 11.725,33.475
NetR17_1: R17.1 R18.1 U4.9 | length 2.5
  Top Layer w0.2: U4.9@56.2,35.7 56.2,36.575 56.75,37.125 R17.1@57.55,37.125
  other v1: 57.525,37.3
NetR19_1: R19.1 R20.1 U5.2 | length 1.7
  Top Layer w0.3: U5.2 49.425,32.275 v1(49.8,32.65)
OSC0: C5.2 U1.40 Y1.3 | length 9.8
  Top Layer w0.2: U1.40 42.125,25.575 45.25,22.45 Y1.3
  Top Layer w0.5: Y1.3 46.25,20.625 C5.2
OSC1: C6.1 U1.41 Y1.1 | length 11.2
  Top Layer w0.256: U1.41 43.05,26.075 44.75,27.775 46.125,27.775 48.35,25.55 Y1.1@48.35,24.05
PD0_3.3V: R7.1 U1.58 | length 9.3
  Top Layer w0.256: U1.58 34,40.15 34.05,40.2 R7.1@34.525,40.2
PHA1: P_QEI2.1 U1.15 | length 6.8
  Top Layer w0.256: P_QEI2.1@24.075,22.725 24.075,22.05 24.975,21.15 26.85,21.15 28.275,22.575 U1.15
PHA2: P_QEI1.1 U1.53 | length 18.3
  Top Layer w0.254: U1.53 36.5,30.075 37.025,29.55 v1(37.025,28.675)
  Bottom Layer w0.254: P_QEI1.1 23.775,30.025 23.775,28.95 36.75,28.95 v1(37.025,28.675)
PHB1: P_QEI2.2 U1.14 | length 2.8
  Top Layer w0.256: P_QEI2.2@26.615,22.725 26.965,23.075 U1.14
PHB2: P_QEI1.2 U1.10 | length 7.4
  Top Layer w0.256: P_QEI1.2@22.6,26.86 25.165,26.86 26.95,25.075 U1.10
PWM0: PWM1.1 U1.61 | length 15.9
  Top Layer w0.256: PWM1.1 21.849,36.574 22.75,37.475 25.275,37.475 25.675,37.075 25.675,35.525 26.675,34.525 31.125,34.525 32.5,33.15 U1.61
PWM1: PWM1.2 U1.62 | length 11.1
  Top Layer w0.256: PWM1.2 24.389,35.336 25.725,34 30.9,34 32,32.9 U1.62
PWM2: PWM1.3 U1.59 | length 11.3
  Top Layer w0.256: PWM1.3 26.994,36.244 28.225,37.475 30.175,37.475 33.5,34.15 U1.59
PWM3: PWM1.4 U1.60 | length 7.1
  Top Layer w0.256: PWM1.4 30.681,36.244 33,33.925 U1.60
PWM4: PWM2.1 U1.28 | length 14.7
  Top Layer w0.256: PWM2.1 36.5,13.102 U1.28
PWM5: PWM2.2 U1.29 | length 14.3
  Top Layer w0.256: PWM2.2@34.176,7.801 PWM2.2 37,11.062 U1.29
PWM6: PWM2.3 U1.30 | length 13
  Top Layer w0.254: PWM2.3 36.279,8.304 37.5,9.525 U1.30
PWM7: PWM2.4 U1.31 | length 12.8
  Top Layer w0.256: U1.31 38,8.875 38.45,8.425 38.45,8.17 PWM2.4
PWR_SW: PWR1.3 U3.25 | length 21.3
  Bottom Layer w0.5: PWR1.3 13.68,40.5 16.655,40.5 18.5,38.655 18.5,30.85 19.725,29.625 U3.25
RST_IC: R13.2 R16.2 U3.26 | length 33.2
  Top Layer w0.5: v1(21.3,24.625) 21.3,29.975 22.075,30.75 24.1,30.75 25.1,29.75 v1(25.6,29.75)
  Bottom Layer w0.5: U3.26 20.75,24.075 v1(21.3,24.625) ; v1@25.773,29.527 36.989,29.527 36.991,29.525 40.625,29.525 41.2,30.1 41.2,31.9 40,33.1 R16.2 40,34.925 R13.2
RST_R: C17.2 ICSP.6 R15.2 S2.1 U3.29 | length 19.6
  Top Layer w0.5: ICSP.6 4.93,30.845 10.275,25.5 S2.1@10.275,22.15 ; R15.2 18.075,23.625 S2.1@18.075,21.85 ; v1(18.075,21.525) S2.1@18.075,21.85 ; C17.2 19.775,20.15 S2.1@18.075,21.85
  Bottom Layer w0.5: v1(18.075,21.525) 18.225,21.675 U3.29
RST_SW: C24.2 C25.2 JTAG.10 Q2.3 R_RST.2 U1.38 | length 42.1
  Top Layer w0.256: U1.38 v1@42,24.575
  Top Layer w0.5: R_RST.2 40.725,37.625 43.263,40.163 46.35,40.163 47.028,39.485 JTAG.10
  Bottom Layer w0.5: Q2.3 42.075,40.325 42.237,40.163 46.35,40.163 47.028,39.485 JTAG.10 48.225,39.395 48.225,35.637 46.138,33.55 43.25,33.5 42.1,33.5 42.025,33.425 ; v1(41.275,35.325) 42.025,34.575 42.025,33.425 ; v1(42.025,24.55) 42.025,33.425
RX_SPI_0: P1.9 U1.21 | length 24.6
  Top Layer w0.254: P1.9 21.115,3.665 22.05,4.6 25.925,4.6 28.496,7.171 28.496,14.838 33,19.342 U1.21
SCK: ICSP.8 U3.17 | length 10
  Bottom Layer w0.5: ICSP.8@4.14,28.48 5.12,27.5 12.3,27.5 12.725,27.075 U3.17
SWITCH1: R_Wake1.2 S1.2 U1.32 U1.33 | length 25.9
  Top Layer w0.254: R_Wake1.2 38.5,12.85 U1.32 38.5,21.55 39.025,22.075 U1.33
  Top Layer w0.5: R_Wake1.2 39.05,11.05 39.65,10.45 46.775,10.45 S1.2@50.45,6.775
TCK: JTAG.4 U1.52 | length 28.4
  Top Layer w0.256: U1.52 37,33.1 39.2,35.3 39.2,40.725 v1(40.25,41.775)
  Bottom Layer w0.256: v1(40.25,41.775) 42.95,41.775 43.975,40.75 54.67,40.75 JTAG.4
TDIO: JTAG.8 U1.50 | length 17.7
  Top Layer w0.256: U1.50 38,32.705 38.82,33.525 46.05,33.525 50.855,38.33 JTAG.8
TDO: JTAG.6 U1.49 | length 18.9
  Top Layer w0.256: U1.49 38.5,32.4 38.8,32.7 v1(44.325,32.7)
  Bottom Layer w0.256: v1(44.325,32.7) 46.251,32.7 46.72,33.169 46.72,33.22 52.985,39.485 JTAG.6
TMS: JTAG.2 U1.51 | length 28.4
  Top Layer w0.256: U1.51 37.5,32.85 39.75,35.1 39.75,38.7 41.825,40.775 57.185,40.775 JTAG.2
TRIGGER: P2.2 U1.64 | length 6.4
  Top Layer w0.256: P2.2@25.567,32.257 26.9,30.925 31,30.925 U1.64
TX_SPI_0: P1.10 U1.22 | length 21.5
  Top Layer w0.254: P1.10 25.89,3.665 28.95,6.725 28.95,14.65 33.5,19.2 U1.22
U1RX: IC1.16 P3.4 U1.45 | length 23.8
  Top Layer w0.2: U1.45 43.158,28.075 44.196,29.113 47.584,29.113 50.925,25.772 50.925,24.325 P3.4@52.15,23.1
  Bottom Layer w0.5: v1(53.1,23.65) 56.85,23.65 58.858,25.658 IC1.16
U1TX: IC1.15 P3.1 U1.46 | length 21.7
  Top Layer w0.254: U1.46 43.054,28.575 44.019,29.54 47.761,29.54 51.501,25.8 P3.1@54.1,25.8
  Top Layer w0.5: P3.1 53.175,25.545 v1(53.175,25.175)
  Bottom Layer w0.5: v1(53.175,25.175) 56.075,25.175 56.877,25.977 IC1.15
U7RX: P1.5 U1.17 | length 20.4
  Top Layer w0.256: P1.5 21.38,8.745 22.225,7.9 25.9,7.9 27.131,9.131 27.131,15.403 31,19.272 U1.17
U7TX: P1.7 U1.18 | length 21.9
  Top Layer w0.256: P1.7 21.055,6.205 22.025,7.175 26.725,7.175 27.587,8.037 27.587,15.215 31.5,19.128 U1.18
USB_DM: U1.43 USB.2 | length 29.1
  Top Layer w0.256: U1.43 43.405,27.075 44.561,28.231 47.219,28.231 50.025,25.425 50.025,14.075 50.05,14.05 52.25,11.85 USB.2
USB_DP: U1.44 USB.3 | length 29
  Top Layer w0.254: U1.44 43.262,27.575 44.373,28.686 47.407,28.686 50.48,25.613 50.48,14.263 52.243,12.5 USB.3
XOSC0: C7.2 U1.34 Y2.2 | length 6.6
  Top Layer w0.254: U1.34 41.475,22.575 41.625,22.425 41.625,17.825 Y2.2
XOSC1: C8.1 U1.36 Y2.1 | length 12.4
  Top Layer w0.254: U1.36 42.525,23.575 43.95,22.15 43.95,17.675 41.6,15.325 Y2.1
pads on no net: IC1.1 IC1.2 IC1.3 IC1.4 IC1.5 IC1.6 IC1.7 IC1.10 IC1.11 IC1.12 IC1.13 IC1.14 ICSP.4 JTAG.7 Q1.0 Q2.0 S1.0 S2.0 U1.1 U1.4 U1.5 U1.6 U1.57 U3.12 U3.19 U4.1 U4.7 U4.11 U4.12 U4.14 U4.15 U4.16 U4.17 U4.19 U4.20 U4.21 U4.22 U5.5 USB.0 VR1.0 VR2.0

## Polygon pours and split planes (outlines as drawn)
GND on Bottom Layer "PLANO_GND" (solid, pour order 2): 60,0 22.5,0 22.5,22.034 18.809,25.725 19.025,25.941 19.025,43.825 60,43.825
GND_BAT on Bottom Layer "PLANO_GND_BAT" (solid, pour order 0): 0,43.825 18.975,43.825 18.975,27.1 22.425,23.65 22.5,23.575 22.5,0 0,0
3.3_VCC on Top Layer "PLANO_3V3" (solid, pour order 8): 60,43.825 19,43.825 19,27.075 22.5,23.575 22.6,23.475 22.6,0 60,0
3.3_VCC_MICRO on Top Layer "PLANO_3V3_Micro" (solid, pour order 6): 27.225,32.95 28.525,34.25 35.9,34.25 41.425,34.25 42.925,32.75 44.425,31.25 44.425,22.25 44.425,21.35 41.2,18.125 40.825,17.75 30.55,17.75 29.625,17.75 28.025,19.35 27.6,19.775 27.6,33.025
5_VCC_BAT on Top Layer "PLANO_5VCC_BAT" (solid, pour order 4): 0,43.825 18.975,43.825 18.975,27.1 22.425,23.65 22.5,23.575 22.5,0 0,0

## Keep-outs
Keep-Out Layer:
  lines w0.256: 0,0 0,43.825 60,43.825 60,0 0,0

## Silkscreen, mask and mechanical layers (free items; w line width, h text height)
Mechanical 15:
  lines w0.256: 0,-8.025 0,-8 ; 15,7.175 15.237,7.175 ; 55.15,-8.025 60,-8.025